# Altium PCB PCB_touch_clock_2022-06-03.pcbdoc
Units mil, origin at the board's own origin, x right, y up, seen from the top; angles counter-clockwise.
Board outline 3824.96 x 2051.73 mil, 2 copper layers (Top Layer, Bottom Layer); 30 components, 40 nets, 124 pads, 30 vias.
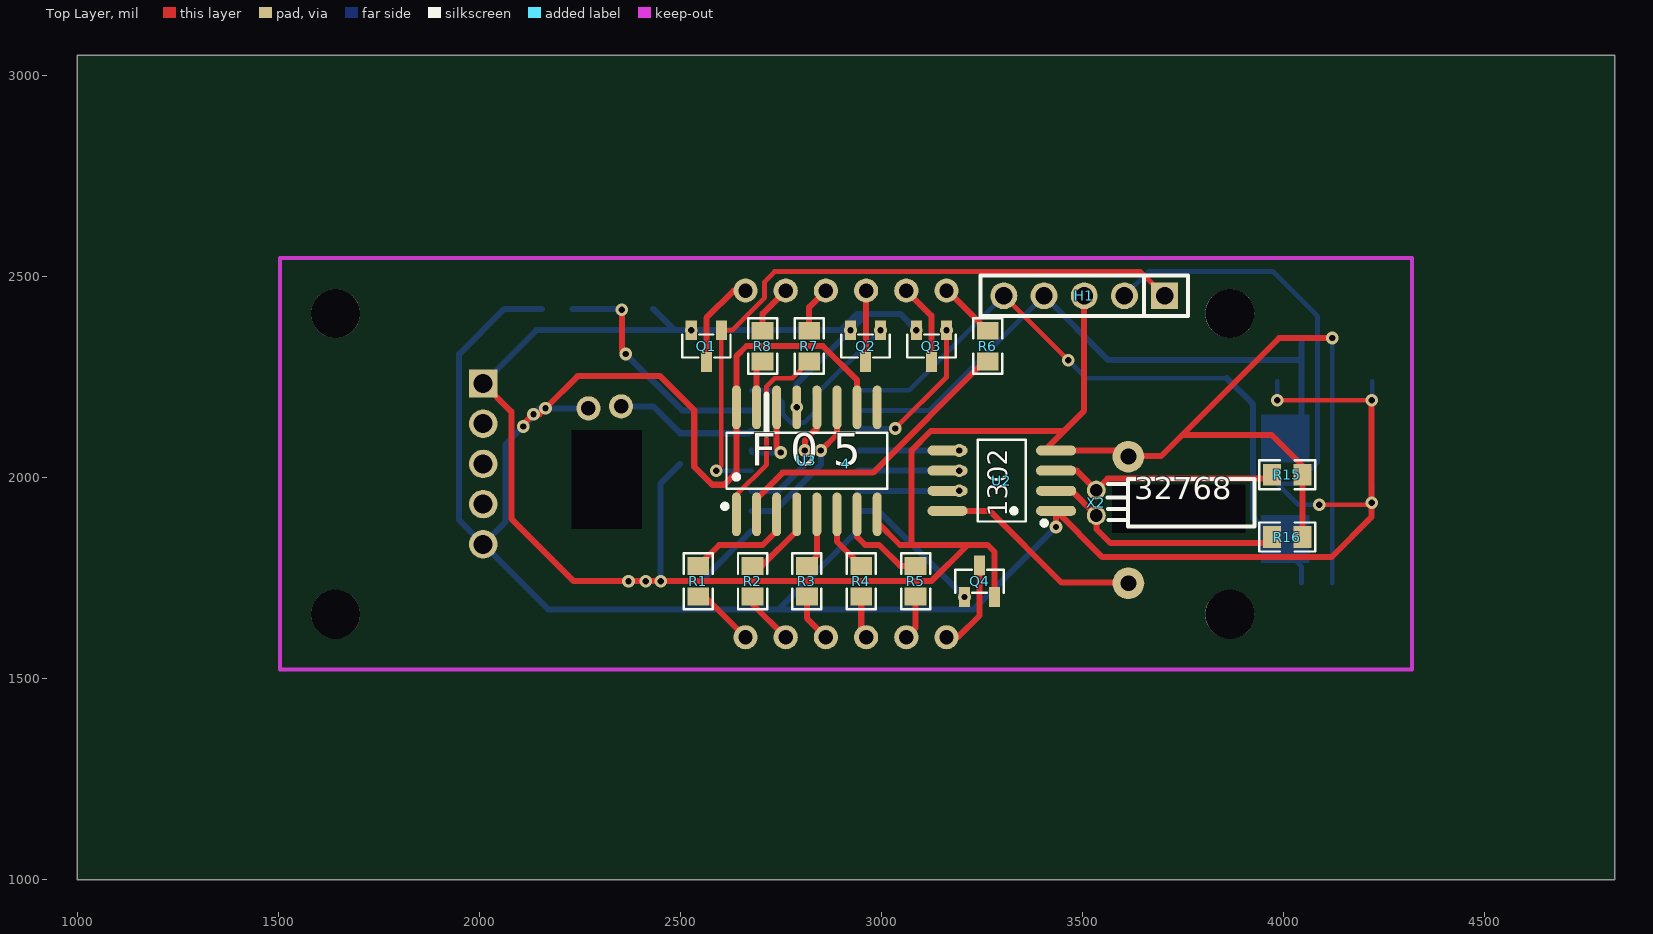
[diagram p0: Top Layer view]
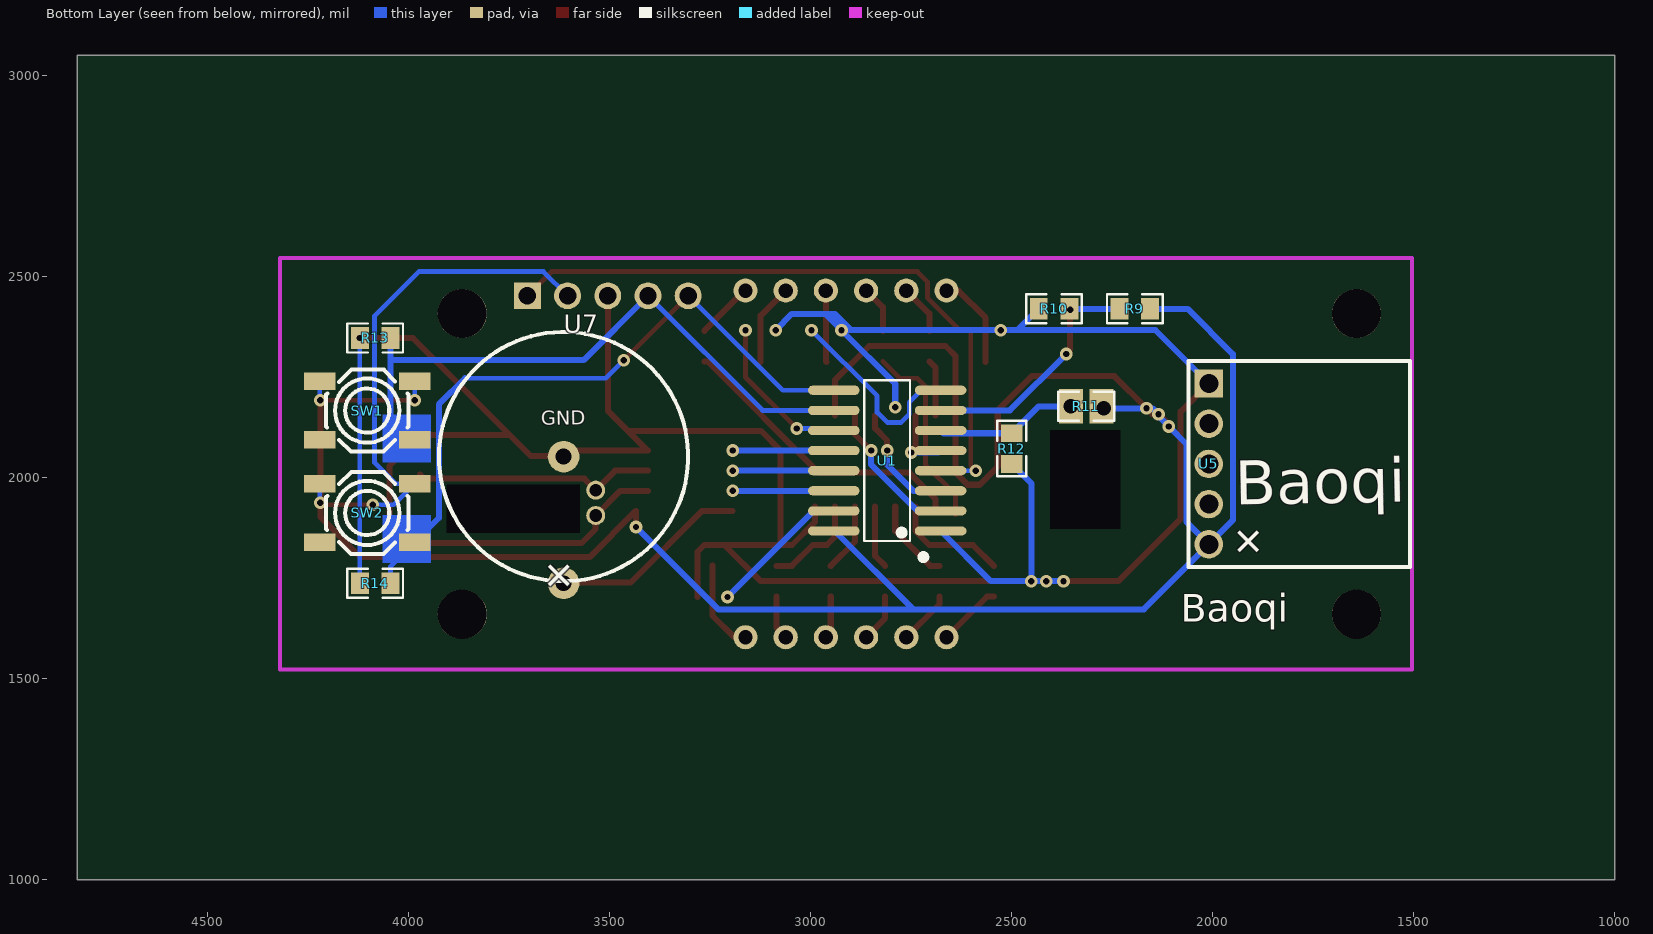
[diagram p1: Bottom Layer view, seen from below]

## Layer stack, top to bottom
Top Layer: signal copper (thickness not stored)
Dielectric: dielectric 12.6, FR-4, Dk 4.8
Bottom Layer: signal copper (thickness not stored)

## Board outline
4824.96,1000 1000,1000 1000,3051.73 4824.96,3051.73
cut-out: 2230,2118.11 2405,2118.11 2405,1873.11 2230,1873.11
cut-out: 3575,1863.11 3575,1983.11 3905,1983.11 3905,1863.11

## Components (designator, comment, footprint, x,y, rotation, side; value= is the part's Value field where it differs from the comment)
4 "_" ? 2912.48,2082.62 r0 top
H1 "PZ254V-11-05P" HDR-TH_5P-P2.54-V-M 3505,2453.11 r180 top
Q1 "S8050_C908252" SOT-23-3_L2.9-W1.3-P1.90-LS2.4-BR 2565,2328.11 r90 top
Q2 "S8050_C908252" SOT-23-3_L2.9-W1.3-P1.90-LS2.4-BR 2961.02,2328.11 r90 top
Q3 "S8050_C908252" SOT-23-3_L2.9-W1.3-P1.90-LS2.4-BR 3125,2328.11 r90 top
Q4 "S8050_C908252" SOT-23-3_L2.9-W1.3-P1.90-LS2.4-BR 3244.8,1743.11 r270 top
R1 "10K" R0805#1 2544.8,1743.11 r270 top
R2 "10K" R0805#1 2680,1743.11 r270 top
R3 "10K" R0805#1 2815.2,1743.11 r270 top
R4 "10K" R0805#1 2950.41,1743.11 r270 top
R5 "10K" R0805#1 3085.61,1743.11 r270 top
R6 "10K" R0805#1 3265,2328.11 r270 top
R7 "10K" R0805#1 2821.02,2328.11 r270 top
R8 "10K" R0805#1 2705,2328.11 r270 top
R9 "10K" R0805#2 2193.98,2420.75 r180 bottom
R10 "10K" R0805#2 2395,2420.75 r180 bottom
R11 "10K" R0805#3 2315,2178.11 r0 bottom
R12 "10K" R0805#2 2500,2073.11 r270 bottom
R13 "10K" R0805#2 4083.74,2348.11 r180 bottom
R14 "10K" R0805#2 4083.74,1738.11 r180 bottom
R15 "10K" R0805#1 4010,2008.11 r0 top
R16 "10K" R0805#1 4010,1853.11 r0 top
SW1 "TS-1187-1816" SW-SMD_4P-L5.2-W5.2-P3.70-LS6.4 4103.43,2167.6 r0 bottom
SW2 "TS-1187-1816" SW-SMD_4P-L5.2-W5.2-P3.70-LS6.4 4103.43,1912.87 r0 bottom
U1 "F05S16" SOP16-LONG_LEG 2810,2043.11 r270 bottom
U2 "DS1302M/TR_C910881" SOP-8_L4.9-W3.9-P1.27-LS6.0-BL 3300,1993.11 r90 top
U3 "74HC595D_C2798023" SOP-16_L10.0-W3.9-P1.27-LS6.0-BL 2815,2042.48 r0 top
U5 "MICRO USB模块" "MICRO USB模块" 2010,2034.92 r180 bottom
U7 "BTR" BTR 3615,2053.11 r0 bottom
X2 "32.768KHz" OSC-TH_BD3.1-P0.8-D0.3 3535,1938.11 r180 top

## Footprints (in the part's own frame and the unit in brackets; to place one, negate y for a bottom-side part, rotate by r counter-clockwise, add the part's x,y. Pads: shape width x height; smd on the part's side, far side on the other; paste and mask are expansions set on the pad)
BTR [mm]
  round 2 hole 1: 1(0,8) 2(0,0)
  silkscreen extent -7.87,-7.88 7.88,7.87
HDR-TH_5P-P2.54-V-M [mm]
  rect 1.7x1.7 hole 1.1: 1(-5.08,0)
  round 1.7 hole 1.1: 2(-2.54,0) 3(0,0) 4(2.54,0) 5(5.08,0)
  silkscreen extent -6.56,-1.27 6.56,1.27
"MICRO USB模块" [mm]
  round 1.8 hole 1.2: D+(0,0) D-(0,-2.54) ID(0,2.54) VCC(0,-5.08)
  rect 1.8x1.8 hole 1.2: GND(0,5.08)
  silkscreen extent -1.28,-6.5 12.71,6.5
OSC-TH_BD3.1-P0.8-D0.3 [mm]
  round 1.2 hole 0.8: 1(0,0.8) 2(0,-0.8)
  silkscreen extent -10,-1.5 -0.7,1.5
R0805#1 [mil]
  rect 44.59x54.21 smd: 1(-38.04,0) 2(38.04,0)
  silkscreen extent -69,-36 69,36
R0805#2 [mil]
  rect 44.59x54.21 smd: 1(38.04,0) 2(-38.04,0)
  silkscreen extent -69,-36 69,36
R0805#3 [mil]
  rect 59.05x86.61 smd: 1(38.04,0) 2(-38.04,0)
  silkscreen extent -69,-36 69,36
SOP16-LONG_LEG [mm]
  oval 0.581x3.257 smd: 1(4.445,3.375) 2(3.175,3.375) 3(1.905,3.375) 4(0.635,3.375) 5(-0.635,3.375) 6(-1.905,3.375) 7(-3.175,3.375) 8(-4.445,3.375) 9(-4.445,-3.375) 10(-3.175,-3.375) 11(-1.905,-3.375) 12(-0.635,-3.375) 13(0.635,-3.375) 14(1.905,-3.375) 15(3.175,-3.375) 16(4.445,-3.375)
  silkscreen extent -5.08,-1.44 6.28,2.47
SOP-8_L4.9-W3.9-P1.27-LS6.0-BL [mil]
  oval 24.8x100 smd: 1(-75,-135) 2(-25,-135) 3(25,-135) 4(75,-135) 5(75,135) 6(25,135) 7(-25,135) 8(-75,135)
  silkscreen extent -111,-112 101,60
SOP-16_L10.0-W3.9-P1.27-LS6.0-BL [mm]
  oval 0.56x2.761 smd: 1(-4.445,-3.381) 2(-3.175,-3.381) 3(-1.905,-3.381) 4(-0.635,-3.381) 5(0.635,-3.381) 6(1.905,-3.381) 7(3.175,-3.381) 8(4.445,-3.381) 9(4.445,3.381) 10(3.175,3.381) 11(1.905,3.381) 12(0.635,3.381) 13(-0.635,3.381) 14(-1.905,3.381) 15(-3.175,3.381) 16(-4.445,3.381)
  silkscreen extent -5.33,-3.02 5.08,1.77
SOT-23-3_L2.9-W1.3-P1.90-LS2.4-BR [mm]
  rect 1.25x0.7 smd: 1(1,-0.95) 2(1,0.95) 3(-1,0)
  silkscreen extent -0.73,-1.53 0.73,1.53
SW-SMD_4P-L5.2-W5.2-P3.70-LS6.4 [mm]
  rect 2x1.1 smd: 1(3,-1.85) 2(-3,-1.85) 3(3,1.85) 4(-3,1.85)
  silkscreen extent -2.6,-2.6 2.6,2.6
? [mil]
  round 60 hole 36: 1(-250,-478.8) 2(-150,-478.8) 3(-50,-478.8) 4(50,-478.8) 5(150,-478.8) 6(250,-478.8) 7(250,383.41) 8(150,383.41) 9(50,383.41) 10(-50,383.41) 11(-150,383.41) 12(-250,383.41)

## Free pads (board coordinates)
  round 60 hole 36: 1(2353.04,2178.11) 3(2271.96,2173.11)
  round 122.05 hole 122.05 unplated: ""(1642.8,1660.9) ""(1642.8,2408.94) ""(3867.21,1660.9) ""(3867.21,2408.94)

## Via types
v1: diameter 31.5, hole 15.75, Top Layer to Bottom Layer, 30 vias

## Nets (pads, with @x,y where several pads share a name; then routed paths per layer and width w, separated by ;. In a path a pad name is that pad's centre, name@x,y a point inside that pad or via, vN(x,y) a via of type N, cw(c..) or ccw(c..) an arc to the next point about the centre after c; other vN are vias at no path point)
1302_CE: U1.12 U2.5 | length 251.5
  Bottom Layer w15: U1.12 v1(3194.39,2068.11)
1302_CLK: U1.14 U2.7 | length 251.5
  Bottom Layer w15: U1.14 v1(3194.39,1968.11)
1302_DAT: U1.13 U2.6 | length 251.5
  Bottom Layer w15: U1.13 v1(3194.39,2018.11)
+5V: H1.2 pad.3 R9.1 R11.2 SW1.1 SW1.2 SW2.1 SW2.2 U1.16 U2.1 U3.10 U3.16 U5.VCC | length 7580.7
  Top Layer w12: v1(3985,2193.11) v1(4220,2193.11) ; v1(4090,1933.11) 4215,1933.11 v1(4220,1938.11)
  Top Layer w15: v1(2110,2128.11) 2110,2133.11 v1(2135,2158.11) 2150,2158.11 v1(2165,2173.11) 2245,2253.11 2450,2253.11 2535,2168.11 2535,2028.11 2580,1983.11 2610,1983.11 2640,2013.11 U3.16 ; U3.16@2640,2155.61 2640,2303.11 2665,2328.11 2855,2328.11 2940,2243.11 U3.10@2940,2155.61 ; v1(3435,1878.11) U2.1 3550,1803.11 4120,1803.11 4220,1903.11 v1(4220,1938.11) v1(4220,2193.11)
  Bottom Layer w12: H1.2 3665,2513.11 3975,2513.11 4085,2403.11 4085,2038.11 4032.6,1985.71 SW2.2 4037.9,1933.11 v1(4090,1933.11) ; v1(3985,2193.11) SW1.2 ; v1(4220,1938.11) 4221.53,1939.64 SW2.1 ; v1(4220,2193.11) 4221.53,2194.64 SW1.1
  Bottom Layer w15: R9.1 2062.6,2420.71 1950,2308.11 1950,1894.91 U5.VCC ; 2202.3,2173.11 v1(2165,2173.11) ; R11.2 pad.3 v1(2165,2173.11) ; U1.16 2940,1868.11 2745,1673.11 ; v1(3435,1878.11) 3230,1673.11 2745,1673.11 ; U5.VCC 2171.8,1673.11 2745,1673.11 ; U5.VCC 2065,1889.92 2065,2083.11 v1(2110,2128.11) 2135,2153.11 v1(2135,2158.11) 2150,2173.11 v1(2165,2173.11)
A: R8.2 U3.15 | length 140.7
  Top Layer w15: U3.15@2690,2155.57 2690,2275.07 R8.2
B: R6.2 U3.2 | length 735.4
  Top Layer w15: U3.2@2690,1929.41 2690,1948.11 2755,2013.11 2980,2013.11 3257,2290.11 R6.2
BATTERY: U2.8 U7.1 | length 494.5
  Top Layer w15: U2.8@3194.4,1918.11 3270,1918.11 3448.5,1739.61 U7.1@3615,1739.61
BTN1: H1.4 R13.1 SW1.4 U1.10 | length 1575.8
  Bottom Layer w12: U1.10 3120,2168.11 H1.4
  Bottom Layer w15: H1.4 3565,2293.11 4045.7,2293.11 4045.7,2282.81 ; SW1.4 4045.7,2155.16 R13.1
BTN2: H1.5 R14.1 SW2.4 U1.9 | length 1686.3
  Top Layer w12: H1.5 v1(3465,2293.11)
  Bottom Layer w12: U1.9 3070,2218.11 H1.5 ; v1(3465,2293.11) 3510,2248.11 3860,2248.11 ; SW2.4 4045.7,1779.66 R14.1
  Bottom Layer w15: 3860,2248.11 3925,2183.11 3925,1900.31 SW2.4
C: R4.1 U3.6 | length 173.3
  Top Layer w15: U3.6@2890,1929.39 2890,1841.56 R4.1
CLOCK: U1.2 U3.11 | length 359.5
  Top Layer w15: v1(2850,2068.11) 2890,2108.11 U3.11@2890,2155.57
  Bottom Layer w15: U1.2 2735,1918.11 2850,2033.11 v1(2850,2068.11)
D: R2.1 U3.4 | length 207.3
  Top Layer w15: R2.1@2680,1781.11 2703,1781.11 2790,1868.11 U3.4@2790,1929.41
DATA: U1.5 U3.14 | length 171.5
  Top Layer w15: U3.14@2740,2155.57 2740,2073.11 v1(2750,2063.11)
  Bottom Layer w15: U1.5 2682.13,2063.11 v1(2750,2063.11)
DP: R3.1 U3.5 | length 158.5
  Top Layer w15: R3.1 2840,1805.94 U3.5@2840,1929.39
E: R1.1 U3.3 | length 292.5
  Top Layer w15: R1.1@2544.8,1781.11 2596.8,1833.11 2705,1833.11 2740,1868.11 U3.3@2740,1929.41
F: R7.2 U3.1 | length 481.5
  Top Layer w12: U3.1 2640,1958.11 2715,2033.11 2715,2228.11 2735,2248.11 2779.1,2248.11 R7.2
G: R5.1 U3.7 | length 251.7
  Top Layer w15: U3.7@2940,1929.41 2940,1853.11 2960,1833.11 2995,1833.11 3047,1781.11 R5.1@3085.6,1781.11
GND: H1.3 Q1.2 Q2.2 Q3.2 Q4.2 R10.2 R12.1 R13.2 R14.2 R15.2 R16.2 U1.1 U2.4 U3.8 U3.13 U5.GND U7.2 | length 7549.3
  Top Layer w15: U5.GND 2080,2164.91 2080,1898.11 2235,1743.11 v1@2371.7,1743.11 ; v1(2371.65,1743.11) v1(2414.24,1743.11) v1(2451.39,1743.11) 3124.97,1743.11 3214.97,1833.11 ; U3.8@2990,1929.39 2990,1890.01 3046.9,1833.11 3265,1833.11 3282.2,1815.91 Q4.2 ; 3099.1,1833.11 3075,1833.11 3075,2068.11 3123.8,2116.91 3454.4,2116.91 ; H1.3 3505,2167.5 3405.61,2068.11 3601.49,2068.11 3615,2054.6 3696.5,2054.61 3990,2348.11 v1(4121.78,2348.11) ; 3749.2,2107.31 3970.8,2107.31 4048,2030.11 R15.2 ; R16.2 R15.2
  Bottom Layer w12: R14.2 v1(4121.78,2348.11)
  Bottom Layer w15: U5.GND 2142.6,2367.51 v1(2527.6,2367.48) ; v1(2371.65,1743.11) 2552.13,1743.11 U1.1 ; R10.2 2486.31,2367.48 v1(2527.6,2367.48) ; v1(2451.39,1743.11) 2451.39,1986.46 R12.1 ; v1(2790,2175.57) 2790,2233.91 v1(2923.62,2367.48) ; 2880,2367.51 2899.4,2367.51 2940,2408.11 2993,2408.11 ; 2898,2367.51 2909.4,2367.51 2950,2408.11 2978.5,2408.11 ; v1(3087.6,2367.48) 3046.97,2408.11 2964.25,2408.11 v1(2923.62,2367.48) ; v1(2527.6,2367.48) v1(2923.62,2367.48)
HG: pad.1 R11.1 R12.2 U1.6 | length 354.7
  Bottom Layer w15: R11.1 2433.04,2178.11 R12.2 2670.17,2111.15 U1.6
LIGHT: R9.2 R10.1 U1.7 | length 609.2
  Top Layer w15: v1(2355,2418.11) 2355,2318.11 v1(2365,2308.11)
  Bottom Layer w15: R9.2 R10.1 ; v1(2365,2308.11) 2505,2168.11 U1.7
NUM2: Q2.1 U1.8 | length 491
  Bottom Layer w12: U1.8 2725,2218.11 2755,2188.11 2755,2158.11 2775,2138.11 2810,2138.11 2835,2163.11 2835,2204.01 v1(2998.42,2367.48)
NUM3: Q3.1 U1.11 | length 391.3
  Top Layer w12: v1(3035,2123.11) 3162.4,2250.51 v1(3162.4,2367.48)
  Bottom Layer w12: U1.11 2947.9,2123.11 v1(3035,2123.11)
NUM4: Q4.1 U1.15 | length 353.3
  Bottom Layer w15: U1.15 2993.03,1918.11 v1(3207.39,1703.74)
OUT: U1.3 U3.12 | length 294.7
  Top Layer w15: v1(2810,2068.11) 2810,2093.11 2840,2123.11 U3.12@2840,2155.61
  Bottom Layer w15: U1.3 2745,1968.11 2810,2033.11 v1(2810,2068.11)
Q1_3: 4.12 Q1.3 | length 235
  Top Layer w15: Q1.3 2565,2398.11 2632.9,2466.01 4.12
Q2_3: 4.9 Q2.3 | length 177.9
  Top Layer w15: Q2.3 2962.48,2290.2 4.9
Q3_3: 4.8 Q3.3 | length 203.2
  Top Layer w15: 4.8 3125,2403.5 Q3.3
Q4_3: 4.6 Q4.3 | length 229.3
  Top Layer w15: 4.6 3190.71,1603.82 3244.8,1657.9 Q4.3
R1_2: 4.1 R1.2 | length 159.6
  Top Layer w15: R1.2 2561.23,1705.07 4.1
R2_2: 4.2 R2.2 | length 135.4
  Top Layer w15: R2.2 2680,1686.3 4.2
R3_2: 4.3 R3.2 | length 120.8
  Top Layer w15: R3.2 2815.2,1651.1 4.3
R4_2: 4.4 R4.2 | length 106.3
  Top Layer w15: R4.2 2950.41,1615.9 4.4
R5_2: 4.5 R5.2 | length 110.8
  Top Layer w15: 4.5 3085.61,1626.95 R5.2
R6_1: 4.7 R6.1 | length 143.9
  Top Layer w15: 4.7 3165.13,2466.02 R6.1
R7_1: 4.10 R7.1 | length 117
  Top Layer w15: R7.1 2821.02,2424.56 4.10
R8_1: 4.11 R8.1 | length 123.7
  Top Layer w15: R8.1 2705,2408.54 4.11
RST/NUM1: H1.1 Q1.1 U1.4 | length 1652.9
  Top Layer w12: v1(2590,2018.11) 2602.4,2030.51 Q1.1 2629.4,2367.51 2710,2448.11 2710,2488.11 2735,2513.11 3645,2513.11 H1.1
  Bottom Layer w12: v1(2590,2018.11) U1.4
S$4703: 
X2_1: R15.1 U2.3 X2.2 | length 602.4
  Top Layer w15: U2.3@3405.61,2018.11 3486.5,2018.11 X2.2 3563.5,1998.11 3961.96,1998.11 R15.1
X2_2: R16.1 U2.2 X2.1 | length 654.9
  Top Layer w15: U2.2@3405.6,1968.11 3473.5,1968.11 X2.1 3535,1873.11 3570,1838.11 3972,1838.11 R16.1
pads on no net: SW1.3 SW2.3 U3.9 U5.D+ U5.D- U5.ID

## Other copper
Bottom Layer:
  rectangle net BTN1: 3945,2038.11 4065,2158.11
  rectangle net BTN2: 3945,1788.11 4065,1908.11

## Silkscreen, mask and mechanical layers (free items; w line width, h text height)
Top Overlay:
  lines w15 net S$4703: 2715,2108.11 2715,2208.11
  text "F 0 5" at 2675,2003.11 h137.79
  text "32768" at 3630,1928.11 h94.49
  text "1302" at 3330,1903.11 h82.68 r90
Bottom Overlay:
  text "Baoqi" at 1944.04,1933 h110.24 r359
  text "Baoqi" at 2080,1618.11 h118.11
Bottom Solder:
  rectangle net BTN1: 3943,2036.11 4067,2160.11
  rectangle net BTN2: 3943,1786.11 4067,1910.11

## Text inside footprints (layer, text, board x,y; h text height)
U5: Bottom Overlay "+" at 1903.28,1898.2 h80 r135
U7: Bottom Overlay "GND" at 3670,2118.15 h60 r359; Bottom Overlay "+" at 3683.28,1764.87 h80 r45